# EAGLE board matrix_led_schield (EAGLE 9.2.2)
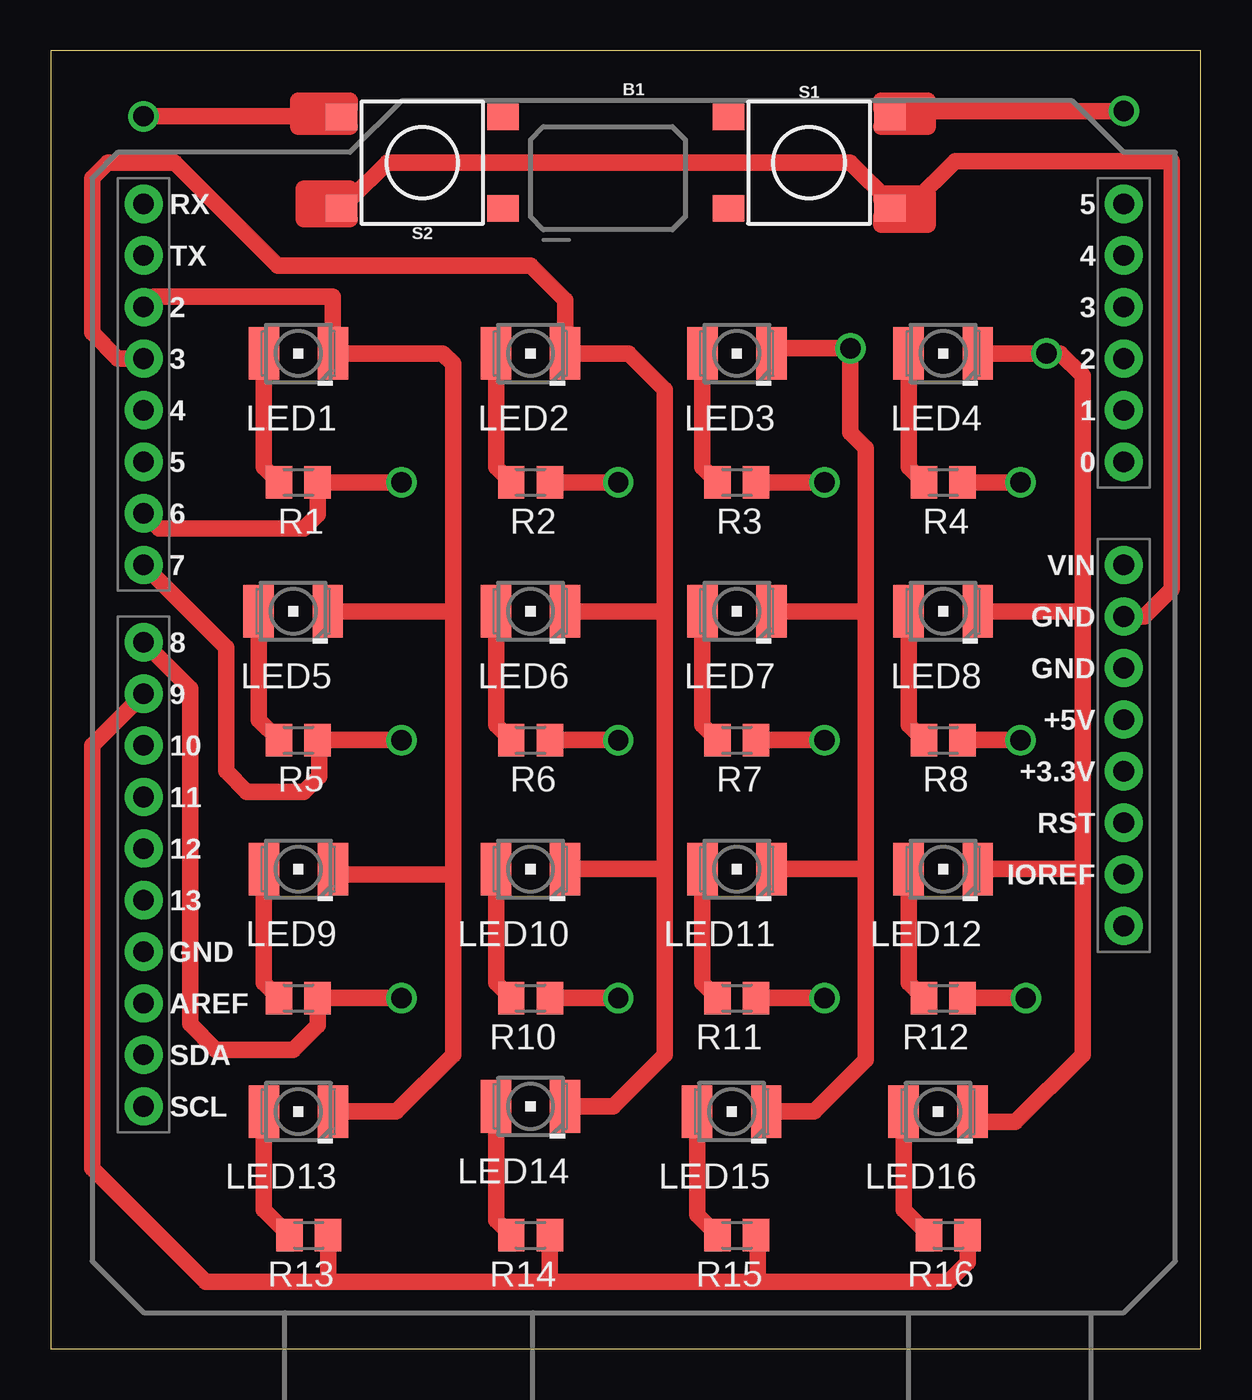
[diagram p0: board, top side]
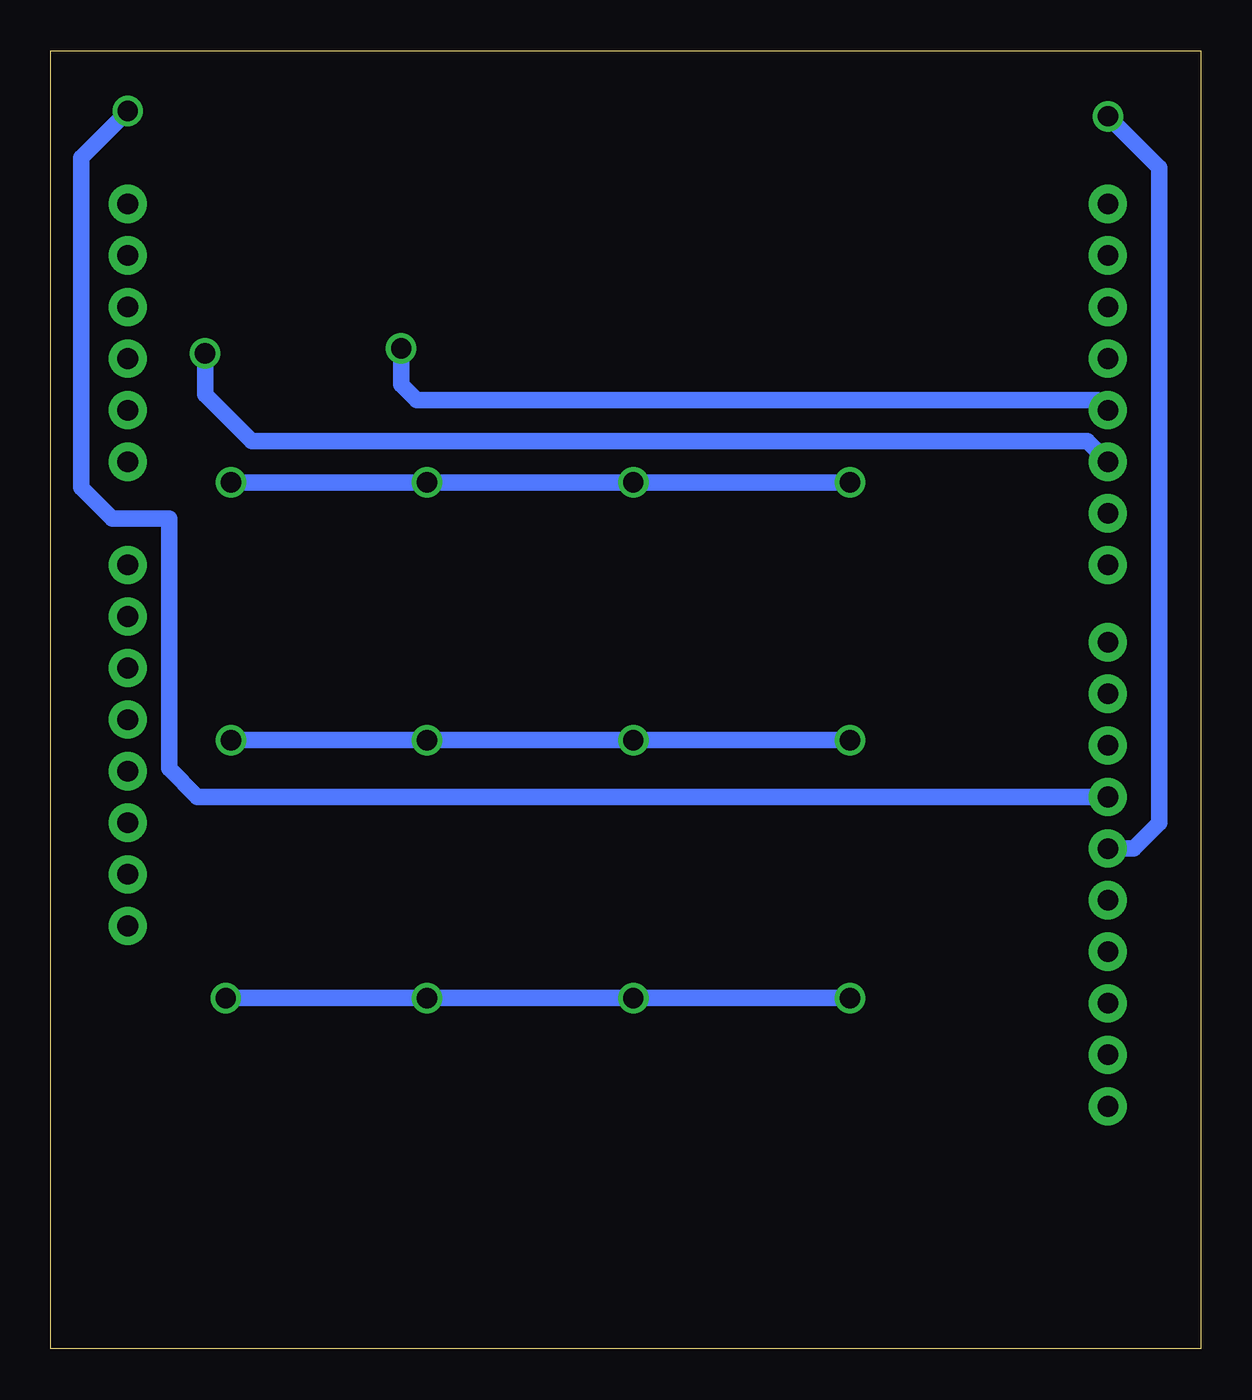
[diagram p1: board, bottom side, seen from below]

Size 56.62 x 63.93 mm. Coordinates in mm from the lower left corner, seen from the top.
Outline: 0,0 56.62,0 56.62,63.93 0,63.93 0,0
Copper layers (1*16): Top 0.035mm / dielectric 1.5mm / Bottom 0.035mm
Design rules "default": minimum track width 6mil, minimum drill 0.35mm, track to track 6mil, track to pad 6mil, pad to pad 6mil, via to via 6mil, smd to smd 6mil, copper to edge 40mil, drill to drill 6mil, minimum pad ring 10mil, minimum via ring 8mil, stop-mask expansion 4mil, vias tented up to drill 0mil, thermal gap 10mil
Net classes: 0 default: width 0.762 mm, clearance 0.254 mm

## Footprints (pad centres in the part's own frame; a part is rotated, then mirrored left to right if it is on the bottom)
UNO_R3_SHIELD = drill 1.016 pad 1.88: 3.3V 24.13,-2.54; 5V 24.13,0; A0 24.13,12.7; A1 24.13,15.24; A2 24.13,17.78; A3 24.13,20.32; A4 24.13,22.86; A5 24.13,25.4; AREF -24.13,-13.97; D2 -24.13,20.32; D3 -24.13,17.78; D4 -24.13,15.24; D5 -24.13,12.7; D6 -24.13,10.16; D7 -24.13,7.62; D8 -24.13,3.81; D9 -24.13,1.27; D10 -24.13,-1.27; D11 -24.13,-3.81; D12 -24.13,-6.35; D13 -24.13,-8.89; GND@0 24.13,2.54; GND@1 24.13,5.08; GND@2 -24.13,-11.43; IOREF 24.13,-7.62; NC 24.13,-10.16; RES 24.13,-5.08; RX -24.13,25.4; SCL -24.13,-19.05; SDA -24.13,-16.51; TX -24.13,22.86; VIN 24.13,7.62
PLCC2 = smd 2.6 x 1.5: A 0,1.7; C 0,-1.7
M0805 = smd 1.3 x 1.6: 1 -0.95,0; 2 0.95,0
TACTILE_SWITCH_SMD_6.2MM_TALL = smd 1.55 x 1.3: A1 -3.975,-2.25; A2 3.975,-2.25; B1 -3.975,2.25; B2 3.975,2.25

## Placement (x,y rotation side)
B1  ARDUINO_UNO_R3_SHIELDBASIC  [UNO_R3_SHIELD]  28.7,30.99 0 top
LED1  [PLCC2]  12.19,49.02 90 top
LED2  [PLCC2]  23.62,49.02 90 top
LED3  [PLCC2]  33.78,49.02 90 top
LED4  [PLCC2]  43.94,49.02 90 top
LED5  [PLCC2]  11.94,36.32 90 top
LED6  [PLCC2]  23.62,36.32 90 top
LED7  [PLCC2]  33.78,36.32 90 top
LED8  [PLCC2]  43.94,36.32 90 top
LED9  [PLCC2]  12.19,23.62 90 top
LED10  [PLCC2]  23.62,23.62 90 top
LED11  [PLCC2]  33.78,23.62 90 top
LED12  [PLCC2]  43.94,23.62 90 top
LED13  [PLCC2]  12.19,11.68 90 top
LED14  [PLCC2]  23.62,11.94 90 top
LED15  [PLCC2]  33.53,11.68 90 top
LED16  [PLCC2]  43.69,11.68 90 top
R1  82ohm  [M0805]  12.19,42.67 180 top
R2  82ohm  [M0805]  23.62,42.67 180 top
R3  82ohm  [M0805]  33.78,42.67 180 top
R4  82ohm  [M0805]  43.94,42.67 180 top
R5  82ohm  [M0805]  12.19,29.97 180 top
R6  82ohm  [M0805]  23.62,29.97 180 top
R7  82ohm  [M0805]  33.78,29.97 180 top
R8  82ohm  [M0805]  43.94,29.97 180 top
R9  82ohm  [M0805]  12.19,17.27 180 top
R10  82ohm  [M0805]  23.62,17.27 180 top
R11  82ohm  [M0805]  33.78,17.27 180 top
R12  82ohm  [M0805]  43.94,17.27 180 top
R13  82ohm  [M0805]  12.7,5.59 180 top
R14  82ohm  [M0805]  23.62,5.59 180 top
R15  82ohm  [M0805]  33.78,5.59 180 top
R16  82ohm  [M0805]  44.2,5.59 180 top
S1  MOMENTARY-SWITCH-SPST-SMD-6.2MM-TALL  [TACTILE_SWITCH_SMD_6.2MM_TALL]  37.34,58.42 0 top
S2  MOMENTARY-SWITCH-SPST-SMD-6.2MM-TALL  [TACTILE_SWITCH_SMD_6.2MM_TALL]  18.29,58.42 180 top

## Library data of the parts
B1 = SparkFun-Boards
LED1-LED16 = led; COLOR: green
R1-R16 = rcl; SPICEPREFIX: R
S1 S2 = SparkFun-Switches; PROD_ID: SWCH-11966; SF_SKU: COM-12992

## Nets
N$1: B1.D12 S2.A2
N$2: B1.D11 S1.B2
N$3: B1.GND@1 S1.A2 S2.B2
N$4: LED1.A R1.2
N$5: LED2.A R2.2
N$6: LED3.A R3.2
N$7: LED4.A R4.2
N$8: LED5.A R5.2
N$9: LED6.A R6.2
N$10: LED7.A R7.2
N$11: LED8.A R8.2
N$12: LED9.A R9.2
N$13: LED10.A R10.2
N$14: LED11.A R11.2
N$15: LED12.A R12.2
N$16: LED13.A R13.2
N$17: LED14.A R14.2
N$18: LED15.A R15.2
N$19: LED16.A R16.2
PYSTY1: B1.D2 LED1.C LED5.C LED9.C LED13.C
PYSTY2: B1.D3 LED2.C LED6.C LED10.C LED14.C
PYSTY3: B1.D4 LED3.C LED7.C LED11.C LED15.C
PYSTY4: B1.D5 LED4.C LED8.C LED12.C LED16.C
VAAKA1: B1.D6 R1.1 R2.1 R3.1 R4.1
VAAKA2: B1.D7 R5.1 R6.1 R7.1 R8.1
VAAKA3: B1.D8 R9.1 R10.1 R11.1 R12.1
VAAKA4: B1.D9 R13.1 R14.1 R15.1 R16.1

## Tracks (layer width: path | path; a pad name or v marks a point on that pad's centre or on a via)
N$1  (via drill 1)
  Top 0.813: 4.61,60.67 v4.57,60.71 13.34,60.71 13.46,60.83 | S2.A2 14.73,61.09 14.73,61.47 12.19,61.47 12.19,60.2 14.1,60.2 | 14.73,60.2 14.1,60.2 | 14.1,60.2 13.46,60.83 | 13.46,60.83 13.46,60.96 12.7,60.96
  Bottom 0.813: v4.57,60.71 2.03,58.17 2.03,25.91 3.3,24.64 B1.D12
N$2  (via drill 1)
  Top 0.813: 52.8,60.92 v52.83,60.96 42.42,60.96 42.42,60.83 41.78,60.2 | S1.B2 40.89,61.09 40.89,61.47 43.18,61.47 43.18,60.2 41.78,60.2 | 40.89,60.2 41.78,60.2
  Bottom 0.813: B1.D11 49.4,27.18 50.8,28.58 50.8,40.89 53.59,40.89 55.12,42.42 55.12,58.67 v52.83,60.96
N$3
  Top 0.813: S2.B2 14.73,56.59 | 14.73,56.59 14.73,57.15 12.45,57.15 12.45,55.63 14.1,55.63 | 14.73,55.63 14.1,55.63 | 14.1,55.63 13.46,56.26 13.46,56.64 13.21,56.64 12.95,56.39 | S1.A2 40.89,56.59 40.89,56.9 43.18,56.9 43.18,55.37 40.89,55.37 40.89,55.75 41.53,56.39 | 41.53,56.39 42.42,56.39 | 42.42,56.39 42.67,56.39 42.42,56.13 42.42,55.88 | 42.42,55.88 42.67,55.88 | 42.42,55.88 42.16,55.88 | B1.GND@1 53.85,36.07 55.2,37.42 55.2,58.5 44.53,58.5 42.42,56.39 | 14.73,56.59 16.56,58.42 39.37,58.42 41.4,56.39 41.53,56.39
N$4
  Top 0.813: LED1.A 10.49,43.42 R1.2
N$5
  Top 0.813: LED2.A 21.92,43.42 R2.2
N$6
  Top 0.813: LED3.A 32.08,43.42 R3.2
N$7
  Top 0.813: LED4.A 42.24,43.42 R4.2
N$8
  Top 0.813: LED5.A 10.24,30.98 R5.2
N$9
  Top 0.813: LED6.A 21.92,30.72 R6.2
N$10
  Top 0.813: LED7.A 32.08,30.72 R7.2
N$11
  Top 0.813: LED8.A 42.24,30.72 R8.2
N$12
  Top 0.813: LED9.A 10.49,18.02 R9.2
N$13
  Top 0.813: LED10.A 21.92,18.02 R10.2
N$14
  Top 0.813: LED11.A 32.08,18.02 R11.2
N$15
  Top 0.813: LED12.A 42.24,18.02 R12.2
N$16
  Top 0.813: LED13.A 10.49,6.85 R13.2
N$17
  Top 0.813: LED14.A 21.92,6.34 R14.2
N$18
  Top 0.813: LED15.A 31.83,6.59 R15.2
N$19
  Top 0.813: LED16.A 41.99,6.85 R16.2
PYSTY1
  Top 0.813: 13.89,36.07 LED5.C 19.81,36.32 | B1.D2 5.08,51.82 13.89,51.82 LED1.C 19.3,49.02 19.81,48.51 19.81,36.32 | 19.81,36.32 19.81,23.37 | 19.81,23.37 19.81,14.48 17.02,11.68 LED13.C | LED9.C 14.15,23.37 19.81,23.37
PYSTY2
  Top 0.813: 25.58,36.58 LED6.C 29.97,36.32 30.23,36.07 | 30.23,36.07 30.23,23.62 | 30.23,23.62 30.23,14.48 27.69,11.94 LED14.C | LED10.C 30.23,23.62 | 30.23,36.07 30.23,47.24 28.45,49.02 LED2.C 25.32,51.64 23.62,53.34 11.18,53.34 6.1,58.42 2.79,58.42 2.03,57.66 2.03,50.04 3.3,48.77 B1.D3
PYSTY3  (via drill 1)
  Top 0.813: 35.74,36.58 LED7.C 39.88,36.32 40.13,36.07 | 40.13,36.07 40.13,44.37 39.37,45.13 v39.37,49.28 35.74,49.28 LED3.C | 40.13,36.07 40.13,23.88 | 40.13,23.88 40.13,14.22 37.59,11.68 LED15.C | LED11.C 39.88,23.62 40.13,23.88
  Bottom 0.813: B1.D4 5.08,46.74 38.61,46.74 39.37,47.5 v39.37,49.28
PYSTY4  (via drill 1 pad 1.15)
  Top 0.813: LED4.C v49.02,49.02 49.71,49.02 50.8,47.93 50.8,36.07 | 50.8,36.07 50.8,23.62 | 50.8,23.62 50.8,14.48 47.5,11.18 45.47,11.18 45.47,11.61 LED16.C | LED12.C 50.8,23.62 | LED8.C 50.55,36.32 50.8,36.07
  Bottom 0.813: B1.D5 5.59,44.7 46.74,44.7 49.02,46.99 v49.02,49.02
VAAKA1  (via drill 1)
  Top 0.813: B1.D6 5.33,40.39 12.45,40.39 13.14,41.08 R1.1 v17.27,42.67 | R2.1 v27.94,42.67 | R3.1 v38.1,42.67 | R4.1 v47.75,42.67
  Bottom 0.813: v17.27,42.67 v27.94,42.67 v38.1,42.67 v47.75,42.67
VAAKA2  (via drill 1)
  Top 0.813: B1.D7 8.64,34.54 8.64,28.45 9.65,27.43 12.45,27.43 13.21,28.19 13.21,29.91 R5.1 v17.27,29.97 | R6.1 v27.94,29.97 | R7.1 v38.1,29.97 | R8.1 v47.75,29.97
  Bottom 0.813: v17.27,29.97 v27.94,29.97 v38.1,29.97 v47.75,29.97
VAAKA3  (via drill 1)
  Top 0.813: 24.83,17.02 R10.1 v27.94,17.27 | 34.99,17.02 R11.1 v38.1,17.27 | B1.D8 6.86,32.51 6.86,16 8.13,14.73 11.94,14.73 13.14,15.94 R9.1 v17.27,17.27 | R12.1 v48.01,17.27
  Bottom 0.813: v17.27,17.27 v27.94,17.27 v38.1,17.27 v48.01,17.27
VAAKA4
  Top 0.813: B1.D9 2.03,29.72 2.03,8.89 7.62,3.3 13.72,3.3 | 13.72,3.3 24.38,3.3 | 24.38,3.3 34.8,3.3 | 34.8,3.3 44.2,3.3 45.15,4.25 R16.1 | R15.1 34.8,5.52 34.8,3.3 | R14.1 24.57,3.49 24.38,3.3 | R13.1 13.65,3.37 13.72,3.3